# Altium PCB GD_Tcontroller.PcbDoc
Units mil, origin at the board's own origin, x right, y up, seen from the top; angles counter-clockwise.
Board outline 5905.51 x 1574.8 mil, 2 copper layers (Top Layer, Bottom Layer); 61 components, 54 nets, 219 pads, 36 vias.
Unrouted connection lines stored in the file: 50.
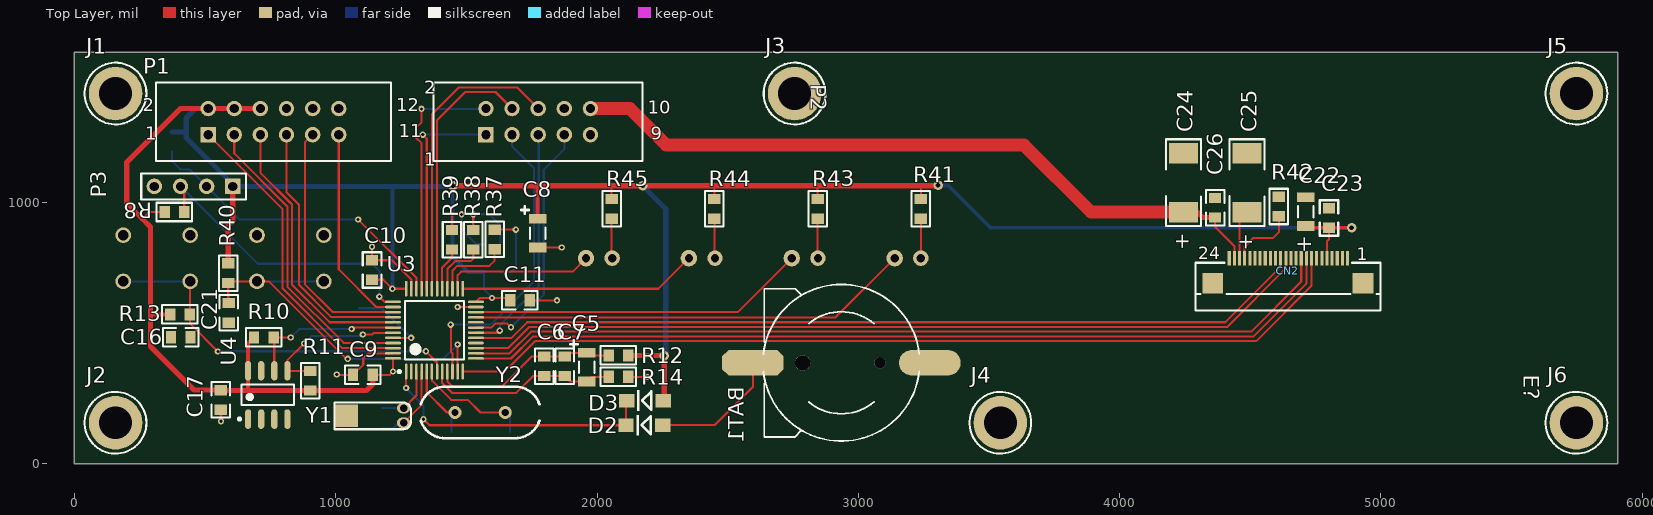
[diagram p0: Top Layer view]
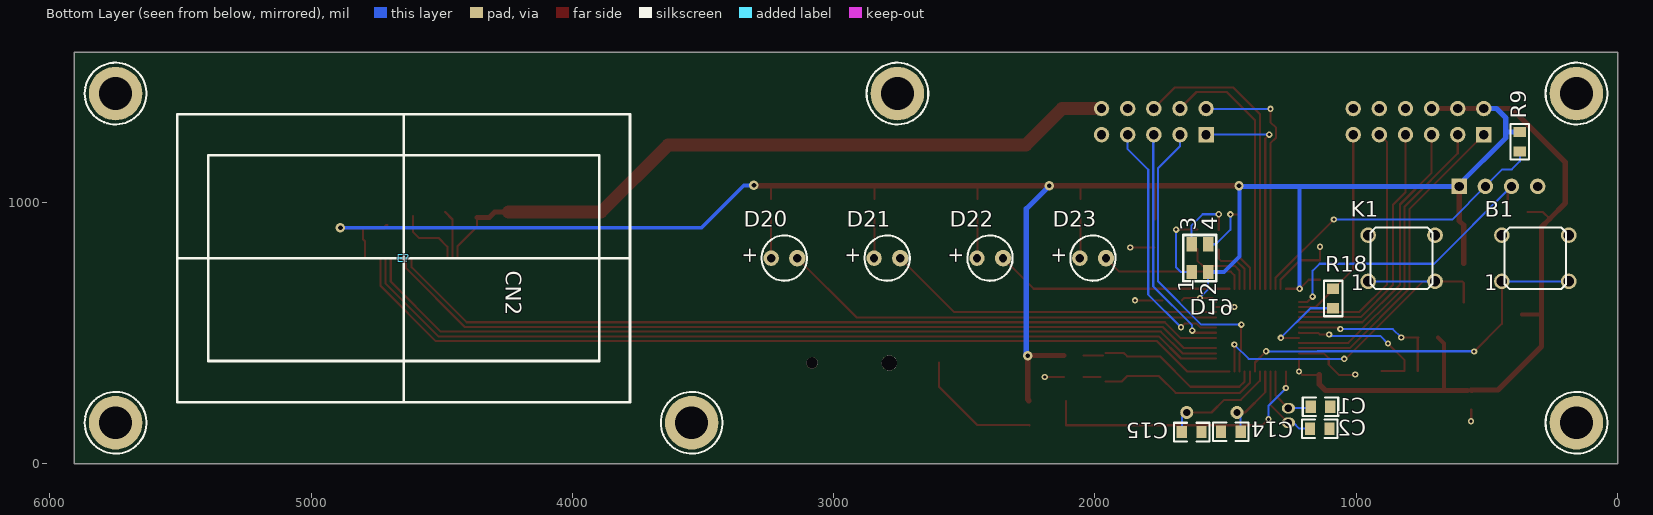
[diagram p1: Bottom Layer view, seen from below]

## Layer stack, top to bottom
Top Solder: solder mask 0.4, Solder Resist, Dk 3.5
Top Layer: signal copper 1.4
Dielectric 1: dielectric 12.6, FR-4, Dk 4.8
Bottom Layer: signal copper 1.4
Bottom Solder: solder mask 0.4, Solder Resist, Dk 3.5

## Board outline
0,0 5905.51,0 5905.51,1574.8 0,1574.8

## Design rules (kind name [scope] priority, off if disabled: settings)
Clearance [All] p1: gap=10 except(5: SMDPad-SMDPad; 8: Track-SMDPad)
PolygonConnect [All] p1: connectstyle=Relief reliefconductorwidth=10 reliefentries=4 polygonreliefangle="90 Angle" airgapwidth=10
RoutingVias [All] p1: holewidth=12 width=24 viastyle="Through Hole" minholewidth=12 minwidth=24 maxholewidth=28 maxwidth=50
SolderMaskExpansion [All] p1: expansion=4
Width [All] p1: maxlimit=50 minlimit=8 preferedwidth=8 minimp=50.000000 maximp=50.000000 favimp=50.000000
30 further rules are at their usual default settings.

## Classes and differential pairs
component class GD_Tcontroller: E? J1 J2 J3 J4 J5 J6 P1 P2
component class GD_Tcontroller_MCU: B1 BAT1 C1 C2 C5 C6 C7 C8 C9 C10 C11 C14 C15 C16 C17 D2 D3 P3 R8 R9 R10 R11 R12 R13 R14 R18 U3 U4 Y1 Y2
component class U_GD_Tcontroller_Front: C21 C22 C23 C24 C25 C26 CN2 D19 D20 D21 D22 D23 K1 R37 R38 R39 R40 R41 R42 R43 R44 R45

## Components (designator, comment, footprint, x,y, rotation, side; value= is the part's Value field where it differs from the comment)
B1 "SW PUSHBUTTON" AN6_3P6_5 314.96,787.4 r180 bottom
BAT1 "CR1220 Sockect SMD" BATM 2935,387 r270 top
C1 "CAP 22pF 50V 0805(2012)" C0805 1137,219 r0 bottom
C2 "CAP 22pF 50V 0805(2012)" C0805 1140,135 r0 bottom
C5 "CAPACITOR" TAN3216 1960,370 r90 top
C6 "CAP 0.01uF 50V 0805(2012)" C0805 1798,374 r90 top
C7 "CAP 0.1uF 50V 0805(2012)" C0805 1877,374 r90 top
C8 "CAPACITOR" TAN3216 1773,883 r90 top
C9 "CAP 0.1uF 50V 0805(2012)" C0805 1104,341 r0 top
C10 "CAP 0.1uF 50V 0805(2012)" C0805 1139,742 r270 top
C11 "CAP 0.1uF 50V 0805(2012)" C0805 1705,626 r180 top
C14 "CAP 22pF 50V 0805(2012)" C0805 1480,123 r180 bottom
C15 "CAP 22pF 50V 0805(2012)" C0805 1630,122 r0 bottom
C16 "CAP 0.1uF 50V 0805(2012)" C0805 407,485 r0 top
C17 "CAP 0.1uF 50V 0805(2012)" C0805 560,245 r90 top
C21 "CAP" C0805 591,578 r90 top
C22 "CAPACITOR" TAN3216 4712,965 r270 top
C23 "CAP" C0805 4801,941 r270 top
C24 "CAPACITOR" TAN6032 4244,1076 r270 top
C25 "CAPACITOR" TAN6032 4487,1076 r270 top
C26 "CAP" C0805 4365,980 r270 top
CN2 "EJ00034" FPC24P0_5 4645.67,787.4 r0 top locked
D2 "1N4148 1206" DIODE_SOP 2251,148 r180 top
D3 "1N4148" DIODE_SOP 2253,242 r180 top
D19 "LED-RGB" LED-RGB-3528 1598.48,787.4 r90 bottom locked
D20 "LED Red 3mm" LED_DIP 3188.98,787.4 r180 bottom locked
D21 "LED Red 3mm" LED_DIP 2795.28,787.4 r180 bottom locked
D22 "LED Red 3mm" LED_DIP 2401.58,787.4 r180 bottom locked
D23 "LED Red 3mm" LED_DIP 2007.87,787.4 r180 bottom locked
E? "Antenna" OLED 4645.67,787.4 r180 bottom locked
J1 "Socket" SCREWFG3_2 157.48,1417.32 r0 top
J2 "Socket" SCREWFG3_2 157.48,157.48 r0 top
J3 "Socket" SCREWFG3_2 2755.91,1417.32 r0 top
J4 "Socket" SCREWFG3_2 3543.31,157.48 r0 top
J5 "Socket" SCREWFG3_2 5748.03,1417.32 r0 top
J6 "Socket" SCREWFG3_2 5748.03,157.48 r0 top
K1 "SW PUSHBUTTON" AN6_3P6_5 826.77,787.4 r180 bottom locked
P1 "Header 6X2" DC3-12P 511.81,1259.84 r0 top locked
P2 "Header 5X2" DC3-10P 1574.8,1259.84 r0 top locked
P3 "Header 4" HDR1X4 606,1062 r180 top
R8 "10K 5% 0805(2012)" R0805 383,964 r0 top
R9 "10K 5% 0805(2012)" R0805 374,1233 r270 bottom
R10 "4.7K 5% 0805(2012)" R0805 725,484 r0 top
R11 "4.7K 5% 0805(2012)" R0805 903,318 r90 top
R12 "10Ohm 5% 0805(2012)" R0805 2082,415 r180 top
R13 "10K 5% 0805(2012)" R0805 404,572 r0 top
R14 "0 Ohm 5% 0805(2012)" R0805 2082,333 r180 top
R18 "10K 5% 0805(2012)" R0805 1089,633 r90 bottom
R37 "470 Ohm 5% 0805" R0805 1608,859 r270 top
R38 "470 Ohm 5% 0805" R0805 1526.5,858 r270 top
R39 "470 Ohm 5% 0805" R0805 1445,858 r270 top
R40 "RES" R0805 589,730 r90 top
R41 "470 Ohm 5% 0805" R0805 3239,976 r90 top
R42 "RES" R0805 4609,985 r90 top
R43 "470 Ohm 5% 0805" R0805 2844,976 r90 top
R44 "470 Ohm 5% 0805" R0805 2449,976 r90 top
R45 "470 Ohm 5% 0805" R0805 2056,976 r90 top
U3 "STM32F103C8T6TR" STM-LQFP48_L 1377.95,511.81 r90 top locked
U4 "AT24C02BN-SP25-T" 8S1_L 740,264 r90 top
Y1 "32.768K 3X8mm" XTAL32 1259.84,157.48 r180 top
Y2 "8MHz" XTAL_US 1456.69,196.85 r0 top

## Footprints (in the part's own frame and the unit in brackets; to place one, negate y for a bottom-side part, rotate by r counter-clockwise, add the part's x,y. Pads: shape width x height; smd on the part's side, far side on the other; paste and mask are expansions set on the pad)
8S1_L [mm] "SOIC, 8-Leads, Body 4.9x3.9mm, Pitch 1.27mm, IPC High Density"
  oval 1.9x0.6 smd: 1(-2.35,1.905) 2(-2.35,0.635) 3(-2.35,-0.635) 4(-2.35,-1.905) 5(2.35,-1.905) 6(2.35,-0.635) 7(2.35,0.635) 8(2.35,1.905)
  silkscreen extent -2.47,-2.55 1,2.88, body extent -1.99,-2.52 1.99,2.52, height 1.75
AN6_3P6_5 [mil] "6.3X6.3X13.8"
  round 60 hole 40: 1(-128,88) 1(128,88) 2(-128,-89) 2(128,-89)
  silkscreen extent -118,-119 118,118, body extent -118,-119 118,118, height 472
BATM [mm]
  round 1.1 hole 1.1 unplated: 0(0,3.748)
  round 1.5 hole 1.5 unplated: 0(0.025,-3.752)
  oct 2.5x6 smd: 1(0,-8.602)
  oval 2.5x6 smd: 2(0,8.598)
  silkscreen extent -7.62,-7.58 7.62,7.57
C0805 [mm]
  rect 1x1.2 smd: 1(-0.95,0) 2(0.95,0)
  silkscreen extent -1.73,-0.9 1.73,0.9, body extent -1.55,-0.7 1.55,0.7, height 1
DC3-10P [mm] "Connector; Header; 10x2 Position"
  rect 1.5x1.5 hole 0.9: 1(0,0)
  round 1.5 hole 0.9: 2(0,2.54) 3(2.54,0) 4(2.54,2.54) 5(5.08,0) 6(5.08,2.54) 7(7.62,0) 8(7.62,2.54) 9(10.16,0) 10(10.16,2.54)
  silkscreen extent -5.08,-2.54 15.24,5.08, body extent -5.08,-2.54 15.24,5.08, height 16
DC3-12P [mm] "Connector; Header; 10x2 Position"
  rect 1.5x1.5 hole 0.9: 1(0,0)
  round 1.5 hole 0.9: 2(0,2.54) 3(2.54,0) 4(2.54,2.54) 5(5.08,0) 6(5.08,2.54) 7(7.62,0) 8(7.62,2.54) 9(10.16,0) 10(10.16,2.54) 11(12.7,0) 12(12.7,2.54)
  silkscreen extent -5.08,-2.54 17.78,5.08, body extent -5.08,-2.54 17.78,5.08, height 16
DIODE_SOP [mm]
  rect 1.5x1.3 smd: 1(0,0) 2(3.556,0)
  silkscreen extent 1.14,-1.02 2.56,1.02
FPC24P0_5 [mm] "SFV24R-2STE1HLF"
  rect 2x2 smd: 0(-7.356,-2.438) 0(7.249,-2.438)
  rect 0.3x1.4 smd: 1(5.75,0) 2(5.25,0) 3(4.75,0) 4(4.25,0) 5(3.75,0) 6(3.25,0) 7(2.75,0) 8(2.25,0) 9(1.75,0) 10(1.25,0) 11(0.75,0) 12(0.25,0) 13(-0.25,0) 14(-0.75,0) 15(-1.25,0) 16(-1.75,0) 17(-2.25,0) 19(-3.25,0) 19(-2.75,0) 20(-3.75,0) 21(-4.25,0) 22(-4.75,0) 23(-5.25,0) 24(-5.75,0)
  silkscreen extent -9.05,-5.1 8.95,-0.45
HDR1X4 [mm] "Connector; Header; 4 Position"
  rect 1.5x1.5 hole 0.9: 1(0,0)
  round 1.5 hole 0.9: 2(2.54,0) 3(5.08,0) 4(7.62,0)
  silkscreen extent -1.27,-1.27 8.89,1.27
LED-RGB-3528 [mm]
  rect 1.4x1 smd: 1(-1.35,0.8) 2(-1.35,-0.8) 3(1.35,0.8) 4(1.35,-0.8)
  silkscreen extent -2.25,-1.6 2.25,1.6, body extent -2.15,-1.5 2.15,1.5, height 2
LED_DIP [mm]
  round 1.5 hole 0.8: 1(-1.27,0)
  round 1.6 hole 0.8: 2(1.27,0)
  silkscreen extent -2.2,-2.2 2.2,2.2, body extent -2.2,-2.2 2.2,2.2, height 5
OLED [mil]
  silkscreen extent -866,-551 866,551, body extent -866,-551 866,551, height 79
R0805 [mm]
  rect 1x1.2 smd: 1(-0.95,0) 2(0.95,0)
  silkscreen extent -1.73,-0.9 1.73,0.9, body extent -1.55,-0.7 1.55,0.7, height 1
SCREWFG3_2 [mm]
  round 5.2 hole 3.2: 1(0,0)
  silkscreen extent -3,-3 3,3
STM-LQFP48_L [mm] "QFP, 48-Leads, Body 7x7mm, Pitch 0.5mm, IPC High Density"
  oval 1.55x0.25 smd: 1(-4.025,2.75) 2(-4.025,2.25) 3(-4.025,1.75) 4(-4.025,1.25) 5(-4.025,0.75) 6(-4.025,0.25) 7(-4.025,-0.25) 8(-4.025,-0.75) 9(-4.025,-1.25) 10(-4.025,-1.75) 11(-4.025,-2.25) 12(-4.025,-2.75) 25(4.025,-2.75) 26(4.025,-2.25) 27(4.025,-1.75) 28(4.025,-1.25) 29(4.025,-0.75) 30(4.025,-0.25) 31(4.025,0.25) 32(4.025,0.75) 33(4.025,1.25) 34(4.025,1.75) 35(4.025,2.25) 36(4.025,2.75)
  oval 0.25x1.55 smd: 13(-2.75,-4.025) 14(-2.25,-4.025) 15(-1.75,-4.025) 16(-1.25,-4.025) 17(-0.75,-4.025) 18(-0.25,-4.025) 19(0.25,-4.025) 20(0.75,-4.025) 21(1.25,-4.025) 22(1.75,-4.025) 23(2.25,-4.025) 24(2.75,-4.025) 37(2.75,4.025) 38(2.25,4.025) 39(1.75,4.025) 40(1.25,4.025) 41(0.75,4.025) 42(0.25,4.025) 43(-0.25,4.025) 44(-0.75,4.025) 45(-1.25,4.025) 46(-1.75,4.025) 47(-2.25,4.025) 48(-2.75,4.025)
  silkscreen extent -4.15,-2.85 2.85,3.55, body extent -3.5,-3.5 3.5,3.5, height 1.6
TAN3216 [mm] "Chip Capacitor, Body 3.2x1.6mm, Height 1mm, IPC High Density"
  rect 0.95x1.7 smd: 1(-1.4,0) 2(1.4,0)
  silkscreen extent -0.55,-0.75 2.63,1.6, body extent -1.7,-0.9 1.7,0.9, height 1
TAN6032 [mm]
  rect 2x2.8 smd: 1(-2.85,0) 2(2.85,0)
  silkscreen extent -4.23,-1.68 4.23,1.7, body extent -3.95,-1.5 3.95,1.5, height 2.5
XTAL32 [mil]
  oval 50x40 hole 28: 1(0,0) 2(0,-56)
  rect 92.13x86 smd: ""(220,-27)
  silkscreen extent -28,-77 264,25
XTAL_US [mil]
  round 50 hole 28: 1(0,0) 2(192.13,0)
  silkscreen extent -131,-98 323,98

## Part data
B1 K1: library part ES00003, "Button ON/OFF，6.3X6.3X9.5MM,DIP-2"
BAT1: library part BAT
C1 C2 C14 C15: library part CMP-1036-01234-1, "CAP 22pF 50V ±1% 0805 (2012 Metric) Thickness 0.75mm SMD"
C5 C8 C22: library part EC00035, "TAN 10uF 20% 10V 3216"
C6 C7 C9 C10 C11 C16 C17: library part CMP-1036-00070-1, "CAP 0.1uF 50V ±20% 0805 (2012 Metric) Thickness 1mm SMD"
C21 C23 C26: library part EC00014, "CAP SMD CR X7R 50V 10% 0.1uF 0805 ROHS"
C24: library part EC00035, "CAP SMD Tan 35V 10% 10uF 2917 ROHS"
C25: library part EC00040, "CAP SMD Tan 35V 10% 4.7uF 2312 ROHS"
CN2: "CONNECTOR FPC0.5MM 24PIN,0.4A,50V,SMT"
D2: library part D, "1N4148"
D3: library part D
D20 D21 D22 D23: library part LED
E?: "Generic Antenna"
P1: "Header, 6-Pin, Dual row"
P2: "Header, 5-Pin, Dual row"
P3: "Header, 4-Pin"
R8 R9 R13 R18: library part CMP-1013-00098-1, "10K 0.125W 5% 0805 (2012 Metric)  SMD"
R10 R11: library part CMP-1013-00098-1, "4.7K 0.125W 5% 0805 (2012 Metric)  SMD"
R12 R14: library part CMP-1013-00098-1, "10Ohm 0.125W 5% 0805 (2012 Metric)  SMD"
R37 R38 R39 R41 R43 R44 R45: library part CMP-1013-00098-1, "470Ohm 0.125W 5% 0805 (2012 Metric)  SMD"
R40: library part ER00031, "RES THICK_FILM SMD 10K 5% 1/8W ROHS 0805"
R42: library part ER00075, "RES 	THICK_FILM SMD 910K 1%	 1/8W 	ROHS 	0805"
U3: library part CMP-0237-00216-3, "ARM Cortex-M3 32-bit MCU, 64 KB Flash, 20 KB Internal RAM, 37 I/Os, 48-pin LQFP, -40 to 85 degC, Tape and Reel"
U4: library part CMP-0152-00023-1, "2Kbit (256 x 8), 2-wire Bus Automotive Serial EEPROM with full memory Write Protect, 2.5V, 8-Pin SOIC, Tape & Reel"
Y1: library part XTAL_1, "32.768K 3mmX8mm"
Y2: library part XTAL, "Crystal Oscillator"

## Via types
v1: diameter 24, hole 12, Top Layer to Bottom Layer, 31 vias
v2: diameter 36, hole 18, Top Layer to Bottom Layer, 5 vias

## Nets (pads, with @x,y where several pads share a name; then routed paths per layer and width w, separated by ;. In a path a pad name is that pad's centre, name@x,y a point inside that pad or via, vN(x,y) a via of type N, cw(c..) or ccw(c..) an arc to the next point about the centre after c; other vN are vias at no path point)
3.3V: C8.2 C9.2 C10.2 C11.2 C17.2 C22.2 C23.2 CN2.5 D3.1 D19.2 P1.2 P1.4 P1.6 P3.1 R8.1 R9.1 R10.1 R11.1 R12.1 R13.1 R40.2 R41.2 R43.2 R44.2 R45.2 U3.24 U3.36 U3.48 U4.8 | length 10790.4
  Top Layer w8: 260,937.96 286.04,964 R8.1 ; C10.2 1182.4,704.6 v1(1216.72,670.28) U3.36 ; C9.2 1207,341 v1(1219.49,353.49) U3.48 ; U3.24 1551.34,635 v1(1598,635) 1658.6,635 C11.2 ; 2054,1064 2056,1062 R45.2 ; R44.2 2449,1063 2450,1064 ; R43.2 2844,1062 2846,1064 ; R41.2 3239,1063 3240,1064 ; C22.2@4707,914.88 C22.2@4712,914.88 ; CN2.5 4793.31,852.31 4801,860 C23.2
  Top Layer w15: 291,572 R13.1 ; 665,280.6 U4.8 665,461.4 R10.1 ; 1771,1064 1773,1062 C8.2 ; C22.2 4718.28,903.6 C23.2 v2(4887.4,903.6)
  Top Layer w20: C17.2@557.4,280.6 557,281 558.6,281 C17.2 457.6,282.4 291,449 291,572 291,906.96 260,937.96 200,997.96 200,1154 405.84,1359.84 P1.2 P1.4 P1.6 ; C17.2@575.8,280.6 665,280.6 R11.1 1117.6,280.6 1141.4,304.4 C9.2 ; R40.2 589,913 606,930 P3.1 ; v2@1447,1062 v2(1449,1064) 1771,1064 2054,1064 v2(2175,1064) 2450,1064 2846,1064 3240,1064 3303,1064 v2(3305,1066) ; R12.1 2256,415 v2(2257,414) 2257,246 D3.1
  Bottom Layer w8: D19.2 1566.99,669.01 1598,638 v1(1598,635)
  Bottom Layer w15: v1(1216.72,670.28) 1216.72,1061.72 1217,1062 ; v2@1447,1062 1447,793 1505.75,734.25 D19.2 ; v2(3305,1066) 3344,1066 3506.4,903.6 v2(4887.4,903.6)
  Bottom Layer w20: R9.1 427.8,1270.4 ; P1.2 463.44,1359.84 427.8,1324.2 427.8,1270.4 ; v2@1447,1062 1217,1062 P3.1 606,1070 427.8,1248.2 427.8,1270.4 ; v2(2175,1064) 2263,976 2263,420 v2(2257,414)
12V: C24.2 C26.2 CN2.23 P2.10 | length 2748.9
  Top Layer w8: C26.2 4365,908 4438.98,834.02 CN2.23
  Top Layer w20: C24.2 4296.8,963.8 4318,942.6 C26.2
  Top Layer w50: P2.10 2125.16,1359.84 2264.53,1220.47 3633.53,1220.47 3890.2,963.8 C24.2
BOOT0: R18.1 U3.44 | length 315.9
  Top Layer w8: U3.44 v1(1288.72,482.28)
  Bottom Layer w8: R18.1 1175.4,595.6 v1(1288.72,482.28)
BUTTON: C21.2 K1.2 R40.1 U3.11 | length 1461.8
  Top Layer w8: C21.2@589,617.4 R40.1 594.8,698.4 698.77,698.4 744.32,698.4 1040.72,402 v1(1046,402) ; U3.11 v1(1466.54,456.54) v1@1468,458
  Bottom Layer w8: K1.2@698.77,698.4 K1.2@954.77,698.4 ; v1(1046,402) 1412,402 v1(1466.54,456.54)
GND: B1.1 BAT1.2 C1.1 C2.1 C8.1 C9.1 C10.1 C11.1 C14.1 C15.1 C16.1 C17.1 C21.1 C22.1 C23.1 C24.1 C25.1 C26.1 CN2.1 CN2.2 CN2.3 CN2.6 CN2.7 CN2.11 CN2.12 CN2.24 J1.1 J2.1 J3.1 J4.1 J5.1 J6.1 K1.1 P1.8 P1.10 P1.12 P2.8 P2.9 P3.4 R14.1 R18.2 R42.2 U3.23 U3.35 U3.47 U4.1 U4.2 U4.3 U4.4 U4.7 | length 923.4
  Top Layer w8: C17.1 560,164 v1(561,163) ; v1(1004,342) 1005,341 C9.1 1105.5,379.9 1105.5,404.5 1124.23,423.23 U3.47 ; v1(1139,831) C10.1 1215.6,779.4 1289.37,705.63 U3.35 ; v1(1466.61,600.39) U3.23 ; C11.1 v1(1847,626) ; C8.1 v1(1864.88,827.88) v1@1869,832 ; R14.1 v1(2192,333) v1@2193,334
I2C1_SCL: R10.2 U3.42 U4.6 | length 607.2
  Top Layer w8: U4.6 765,481.4 R10.2 v1(828,484) ; v1@1055,516 v1(1061,516) 1066.65,521.65 U3.42
  Bottom Layer w8: v1(828,484) 860,516 v1(1061,516)
I2C1_SDA: R11.2 U3.43 U4.5 | length 585.3
  Top Layer w8: U4.5 815,397 v1(879,461) ; U4.5@816.12,355.4 R11.2 ; v1@1097,495 v1(1104,495) 1140,495 1146.2,501.2 1218.72,501.2 U3.43
  Bottom Layer w8: v1@876,461 v1(879,461) 908,490 1099,490 v1(1104,495)
LED_AUTO: D20.2 U3.21 | length 1696.3
  Top Layer w8: U3.21 2912.6,561.02 D20.2
LED_B: R37.2 U3.27 | length 290.1
  Top Layer w8: U3.27 1446.85,739.85 1465,758 1588,758 1608,778 R37.2
LED_DEFOG: D23.2 U3.26 | length 570.5
  Top Layer w8: U3.26 1466.54,722.54 1480,736 1906.47,736 D23.2
LED_DEFROST: D22.2 U3.25 | length 913.9
  Top Layer w8: U3.25 2234.45,670.28 D22.2
LED_G: R38.2 U3.28 | length 226.3
  Top Layer w8: U3.28 1427.17,745.62 1457.54,776 1517,776 1526.5,785.5 R38.2
LED_LIGHT: D21.2 U3.22 | length 1294.5
  Top Layer w8: U3.22 2538.58,580.71 D21.2
LED_R: R39.2 U3.29 | length 165.9
  Top Layer w8: U3.29 1407.48,751.39 1445,788.91 R39.2
MOSI: CN2.14 U3.17 | length 3225.8
  Top Layer w8: U3.17 1673.28,482.28 1733,542 4404.32,542 4614.36,752.04 ; CN2.14@4614.36,785.62 CN2.14 4616.14,753.82
NetB1_2: B1.2 C16.2 R13.2 U3.7 | length 1460.9
  Top Layer w8: B1.2@442.96,698.4 442.96,536.04 v1(549,430) ; v1(1345,431) 1387.8,388.2 U3.7
  Bottom Layer w8: B1.2@186.96,698.4 B1.2@442.96,698.4 ; v1(549,430) 550,431 1148.77,431 1149.77,430 1344,430 v1(1345,431)
NetBAT1_1: BAT1.1 D2.1 | length 498.6
  Top Layer w8: D2.1 2252,149 2451,149 2596.35,294.35 BAT1.1
NetC25_2: C25.2 CN2.22 | length 188.1
  Top Layer w8: CN2.22 4458.66,935.46 C25.2
NetCN2_21: CN2.21 R42.1 | length 258.2
  Top Layer w8: CN2.21 4478.35,831.35 4512,865 4587,865 4609,887 R42.1
NetD2_2: D2.2 D3.2 U3.1 | length 1084.7
  Top Layer w8: v1(1269.69,290.31) U3.1 ; v1(1336,171) 1359,148 D2.2 D3.2@2111,240
  Bottom Layer w8: v1@1269.69,288.69 1336,222.37 v1(1336,171)
NetD19_1: D19.1 R37.1 | length 292.9
  Top Layer w8: R37.1 v1(1689.4,896.4)
  Bottom Layer w8: D19.1 1672.25,734.25 1689.4,751.4 v1(1689.4,896.4)
NetD19_3: D19.3 R38.1 | length 253.6
  Top Layer w8: R38.1 v1(1526.5,955.5)
  Bottom Layer w8: v1(1526.5,955.5) 1587.5,955.5 1629.98,913.02 D19.3
NetD19_4: D19.4 R39.1 | length 259.5
  Top Layer w8: R39.1 1445,948 1452,955 v1(1482,955)
  Bottom Layer w8: v1(1482,955) 1482,896 1537.45,840.55 D19.4
NetD20_1: D20.1 R41.1 | length 151.2
  Top Layer w8: D20.1 R41.1
NetD21_1: D21.1 R43.1 | length 149.9
  Top Layer w8: D21.1@2844,788.68 R43.1
NetD22_1: D22.1 R44.1 | length 148.6
  Top Layer w8: D22.1@2449,789.98 R44.1
NetD23_1: D23.1 R45.1 | length 149.3
  Top Layer w8: D23.1@2056,789.28 R45.1
NetU3_16: U3.16
NetU3_20: U3.20
OLED_CS: CN2.8 U3.12 | length 3489.8
  Top Layer w8: U3.12 1646.17,353.35 1762.82,470 4522.68,470 4734.25,681.58 CN2.8
OLED_D/C: CN2.10 U3.14 | length 3361.8
  Top Layer w8: U3.14 1665.14,423.23 1747.91,506 4503,506 4694.88,697.88 CN2.10
OLED_RES: CN2.9 U3.13 | length 3394.4
  Top Layer w8: U3.13 1670.91,403.54 1755.37,488 4512.84,488 4714.57,689.73 CN2.9
OSC32_IN: C1.2 U3.3 Y1.2 | length 240.2
  Top Layer w8: Y1.2 1309.06,262.69 U3.3
  Bottom Layer w8: C1.2@1179.92,213.48 Y1.2
OSC32_OUT: C2.2 U3.4 Y1.1 | length 316.2
  Top Layer w8: Y1.1 1328.74,226.38 U3.4
  Bottom Layer w8: C2.2 1218,135 1240.48,157.48 Y1.1
OSC_IN: C14.2 U3.5 Y2.1 | length 298.9
  Top Layer w8: U3.5 1348.43,274.57 1426.15,196.85 Y2.1
  Bottom Layer w8: C14.2 1442.6,182.76 Y2.1
OSC_OUT: C15.2 U3.6 Y2.2 | length 447.9
  Top Layer w8: 1368.11,318.89 U3.6 ; 1368.87,318.89 1368.87,318.13 1442,245 1506,245 1554.15,196.85 Y2.2
  Bottom Layer w8: Y2.2 1667.4,178.27 C15.2
PWM1: P2.1 U3.32 | length 837.8
  Top Layer w8: v1(1333,1260) 1348.43,1244.57 U3.32
  Bottom Layer w8: v1(1333,1260) P2.1@1574.65,1260
RELAY1: P1.1 U3.46 | length 1223.8
  Top Layer w8: P1.1 797,974.65 797,671.18 1025.26,442.91 U3.46
RELAY2: P1.3 U3.45 | length 1159.3
  Top Layer w8: P1.3 611.81,1188.19 815,985 815,678.63 1030.27,463.36 1218.72,463.36 U3.45
RELAY3: P1.5 U3.41 | length 1070.4
  Top Layer w8: P1.5 711.81,1113.64 833,992.46 833,686.09 976.99,542.1 1218.72,542.1 U3.41
RELAY4: P1.7 U3.40 | length 1005.9
  Top Layer w8: P1.7 811.81,1039.1 860,990.91 860,684.54 982.76,561.79 1218.72,561.79 U3.40
RELAY5: P1.9 U3.39 | length 965.7
  Top Layer w8: P1.9@910.77,1259.84 882,1231.07 882,688 988.53,581.47 1218.72,581.47 U3.39
RELAY6: P1.11 U3.38 | length 782.9
  Top Layer w8: P1.11 1011.81,744.19 1155.61,600.39 U3.38
RS485_EN: P2.2 U3.33 | length 953.2
  Top Layer w8: U3.33 1328.74,1227.49 1307,1249.23 1307,1286 1328.74,1307.74 v1(1328.74,1358.74) v1@1330,1360
  Bottom Layer w8: v1(1328.74,1358.74) P2.2@1573.7,1358.74
RX: P2.6 U3.31 | length 1150.2
  Top Layer w8: U3.31 1368.11,1337.11 1472,1441 1693.65,1441 P2.6
SCK: CN2.13 U3.15 | length 3265.2
  Top Layer w8: U3.15 1659.37,442.91 1740.46,524 4411.77,524 4635.83,748.05 CN2.13
SWCLK: P3.3 R8.2 U3.37 | length 1159.8
  Top Layer w8: P3.3@410,1054 420.4,1043.6 R8.2 ; v1(1167,640) 1186.92,620.08 U3.37
  Bottom Layer w8: P3.3@395,1062 P3.3 702,766 1140,766 1167,739 v1(1167,640)
SWDIO: P3.2 R9.2 U3.34 | length 1199.7
  Top Layer w8: v1(1086,935) 1087,935 1309.06,712.94 U3.34
  Bottom Layer w8: R9.2 374,1158 405,1127 441,1127 P3.2 633,935 v1(1086,935)
TS1: P2.3 U3.10 | length 1166
  Top Layer w8: v1(1440,533) 1440.54,532.46 1440.54,429.32 1446.85,423 U3.10
  Bottom Layer w8: v1(1440,533) 1593,533 1759,699 1759,1131 1674.8,1215.2 P2.3
TS2: P2.5 U3.18 | length 910.4
  Top Layer w8: U3.18 v1@1627.97,501.97 ; v1@1628,502 v1(1628,510)
  Bottom Layer w8: v1(1628,510) 1628,530 1777,679 1777,1257.65 P2.5@1776,1258.65
TS3: P2.7 U3.19 | length 968
  Top Layer w8: U3.19 1595.65,521.65 1611,537 1657,537 v1(1671,523)
  Bottom Layer w8: v1(1671,523) 1796,648 1796,1126 1874.8,1204.8 P2.7
TX: P2.4 U3.30 | length 1002.5
  Top Layer w8: U3.30 1387.8,1314.8 1496,1423 1611.65,1423 P2.4
VDDA: C5.2 C6.2 C7.2 R12.2 U3.9 | length 707.5
  Top Layer w8: U3.9 1427.17,315.29 1447.23,295.23 1635.23,295.23 1751.4,411.4 C6.2 C7.2 1890.72,425.12 C5.2 ; C5.2@1970.12,415 R12.2
VSSA: C5.1 C6.1 C7.1 R14.2 U3.8 | length 714.1
  Top Layer w8: U3.8 1407.48,309.52 1445,272 1691,272 1755.6,336.6 C6.1 C7.1 1898.72,314.88 C5.1 ; C5.1@1978.12,333 R14.2
pads on no net: BAT1.0 CN2.0 CN2.4 CN2.15 CN2.16 CN2.17 CN2.19 CN2.20 U3.2 Y1.

## Silkscreen, mask and mechanical layers (free items; w line width, h text height)
Mechanical 1:
  lines w10: 0,787.4 5905.51,787.4 ; 78.74,78.74 78.74,1496.06 5826.77,1496.06 5826.77,78.74 78.74,78.74

## Dimensions
0,1574.8 to 5905.51,1574.8 on Mechanical 16
0,1574.8 to 0,0 on Mechanical 16

## Text inside footprints (layer, text, board x,y; h text height)
B1: Bottom Overlay "1" at 510.34,664.67 h59.06
C22: Top Overlay "+" at 4682,875 h60 r270
C24: Top Overlay "+" at 4216,884 h59.06 r270
C25: Top Overlay "+" at 4459.44,883.09 h59.06 r270
CN2: Top Overlay "1" at 4907.48,779.53 h47.24; Top Overlay "24" at 4301.18,783.46 h47.24
D19: Bottom Overlay "1" at 1621.12,656.5 h60 r270; Bottom Overlay "2" at 1536.48,643.7 h60 r270; Bottom Overlay "3" at 1612.26,892.72 h60 r270; Bottom Overlay "4" at 1531.56,894.69 h60 r270
D20: Bottom Overlay "+" at 3295.28,763.78 h59.06 r270
D21: Bottom Overlay "+" at 2901.58,763.78 h59.06 r270
D22: Bottom Overlay "+" at 2507.87,763.78 h59.06 r270
D23: Bottom Overlay "+" at 2114.17,763.78 h59.06 r270
K1: Bottom Overlay "1" at 1022.15,664.67 h59.06
P1: Top Overlay "12" at 1231.81,1349.84 h50; Top Overlay "11" at 1241.81,1249.84 h50; Top Overlay "1" at 271.81,1239.84 h50; Top Overlay "2" at 261.81,1349.84 h50
P2: Top Overlay "10" at 2194.8,1339.84 h50; Top Overlay "9" at 2204.8,1239.84 h50; Top Overlay "1" at 1338.58,1141.73 h50; Top Overlay "2" at 1338.58,1417.32 h50